# EAGLE board Line Follower Extensions (EAGLE 8.7.1)
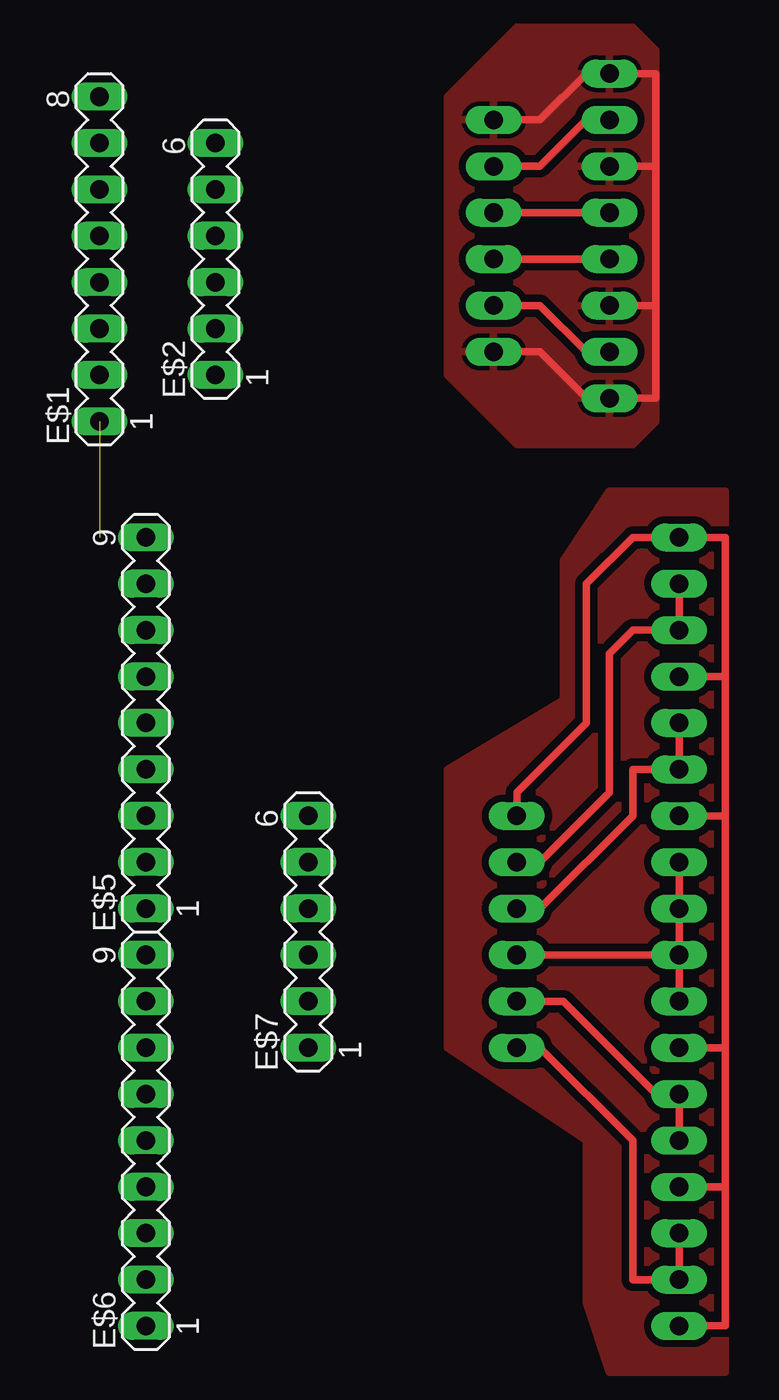
[diagram p0: board, top side]
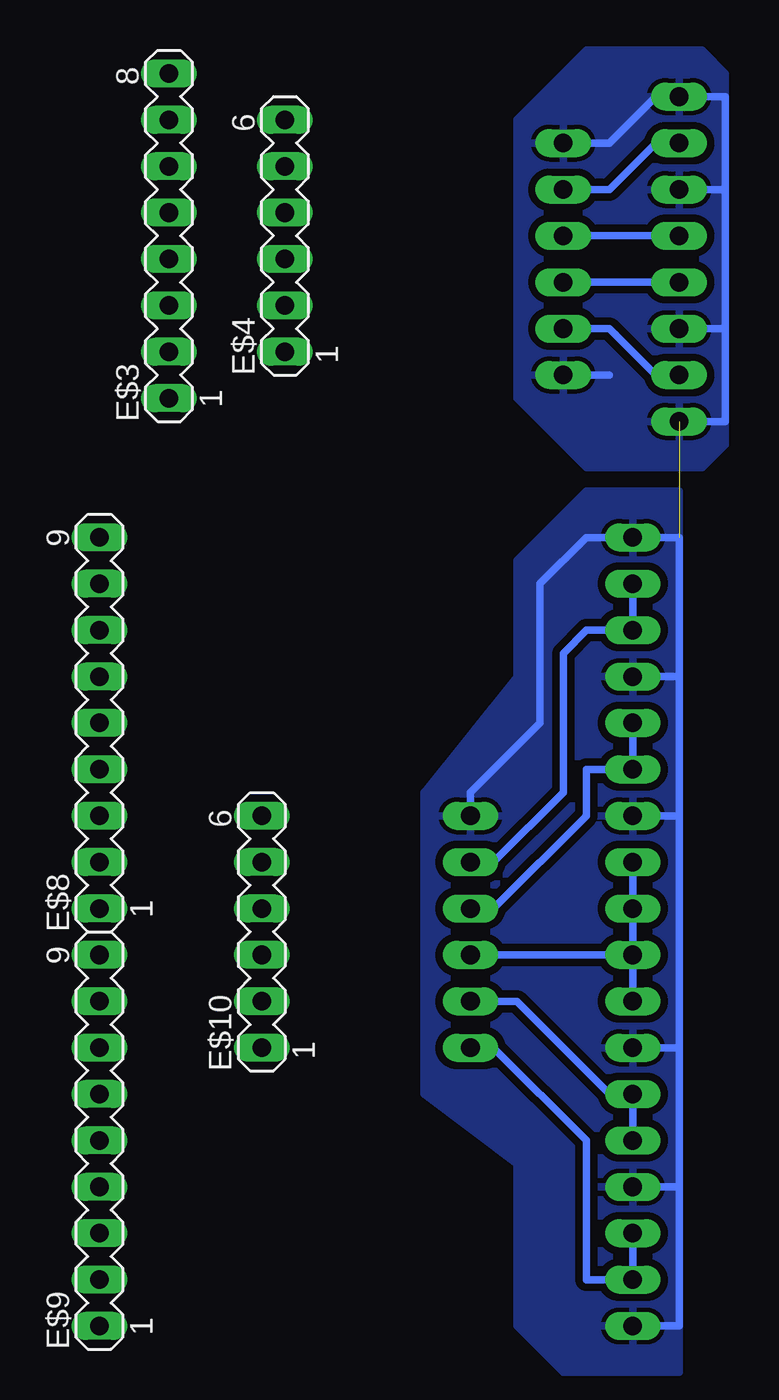
[diagram p1: board, bottom side, seen from below]

No outline drawn. Coordinates in mm, seen from the top.
Copper layers (1*16): Top 0.035mm / dielectric 1.5mm / Bottom 0.035mm
Design rules "default": minimum track width 10mil, minimum drill 24mil, track to track 8mil, track to pad 8mil, pad to pad 8mil, via to via 8mil, smd to smd 8mil, copper to edge 40mil, drill to drill 8mil, minimum pad ring 10mil, minimum via ring 8mil, stop-mask expansion 4mil, vias tented up to drill 0mil, thermal gap 10mil

## Footprints (pad centres in the part's own frame; a part is rotated, then mirrored left to right if it is on the bottom)
MA08-1 = drill 1.016 long: 1 -8.89,0; 2 -6.35,0; 3 -3.81,0; 4 -1.27,0; 5 1.27,0; 6 3.81,0; 7 6.35,0; 8 8.89,0
MA06-1 = drill 1.016 long: 1 -6.35,0; 2 -3.81,0; 3 -1.27,0; 4 1.27,0; 5 3.81,0; 6 6.35,0
MA09-1 = drill 1.016 long: 1 -10.16,0; 2 -7.62,0; 3 -5.08,0; 4 -2.54,0; 5 0,0; 6 2.54,0; 7 5.08,0; 8 7.62,0; 9 10.16,0

## Placement (x,y rotation side)
E$1  [MA08-1]  57.15,44.45 90 top
E$2  [MA06-1]  63.5,44.45 90 top
E$3  [MA08-1]  85.09,45.72 90 bottom
E$4  [MA06-1]  78.74,45.72 90 bottom
E$5  [MA09-1]  59.69,19.05 90 top
E$6  [MA09-1]  59.69,-3.81 90 top
E$7  [MA06-1]  68.58,7.62 90 top
E$8  [MA09-1]  88.9,19.05 90 bottom
E$9  [MA09-1]  88.9,-3.81 90 bottom
E$10  [MA06-1]  80.01,7.62 90 bottom

## Library data of the parts
E$1-E$10 = con-lstb

## Nets
GND: E$1.1 E$1.3 E$1.6 E$1.8 E$2.1 E$2.6 E$5.3 E$5.6 E$5.9 E$6.1 E$6.4 E$6.7 E$7.6
GND1: E$3.1 E$3.3 E$3.6 E$3.8 E$4.1 E$4.6
GND2: E$8.3 E$8.6 E$8.9 E$9.1 E$9.4 E$9.7 E$10.6
S$1: E$3.7 E$4.5
S$2: E$1.4 E$2.3
S$3: E$1.5 E$2.4
S$4: E$3.2 E$4.2
S$5: E$1.2 E$2.2
S$6: E$1.7 E$2.5
S$7: E$3.4 E$4.3
S$8: E$3.5 E$4.4
S$9: E$5.7 E$5.8 E$7.5
S$10: E$5.4 E$5.5 E$7.4
S$11: E$6.5 E$6.6 E$7.2
S$12: E$6.2 E$6.3 E$7.1
S$14: E$8.7 E$8.8 E$10.5
S$15: E$8.4 E$8.5 E$10.4
S$16: E$9.5 E$9.6 E$10.2
S$17: E$9.2 E$9.3 E$10.1
VCC: E$5.1 E$5.2 E$6.8 E$6.9 E$7.3
VCC1: E$8.1 E$8.2 E$9.8 E$9.9 E$10.3

## Tracks (layer width: path | path; a pad name or v marks a point on that pad's centre or on a via)
GND  (1 unrouted)
  Bottom 0.406: 54.61,48.26 54.61,53.34 E$1.8 58.42,53.34 60.96,50.8 E$2.6 | E$1.6 54.61,48.26 | 54.61,48.26 54.61,40.64 | 54.61,40.64 54.61,35.56 E$1.1 58.42,35.56 | 54.61,40.64 E$1.3 | 60.96,38.1 E$2.1 | E$6.1 57.15,-13.97 57.15,-6.35 | E$6.4 57.15,-6.35 | 57.15,-6.35 57.15,1.27 | E$6.7 57.15,1.27 | 57.15,1.27 57.15,13.97 | 57.15,13.97 57.15,21.59 | 57.15,21.59 57.15,29.21 E$5.9 62.23,29.21 64.77,26.67 64.77,19.05 68.58,15.24 E$7.6 | E$5.6 57.15,21.59 | 57.15,13.97 E$5.3
  pour Bottom (isolate 0.406): 54.61,54.61 54.61,34.29 55.88,33.02 59.69,33.02 62.23,33.02 66.04,36.83 66.04,52.07 62.23,55.88 55.88,55.88
  pour Bottom (isolate 0.406): 57.15,31.75 57.15,-16.51 63.5,-16.51 66.04,-13.97 66.04,-5.08 71.12,-1.27 71.12,15.24 66.04,21.59 66.04,27.94 62.23,31.75
  pour Top (isolate 0.406): 91.44,31.75 91.44,-16.51 85.09,-16.51 83.82,-12.7 83.82,-3.81 76.2,1.27 76.2,16.51 82.55,20.32 82.55,27.94 85.09,31.75
GND1
  Top 0.406: 87.63,49.53 87.63,54.61 E$3.8 83.82,54.61 81.28,52.07 E$4.6 | E$3.6 87.63,49.53 | 87.63,49.53 87.63,41.91 | 87.63,41.91 87.63,36.83 E$3.1 83.82,36.83 81.28,39.37 E$4.1 | 87.63,41.91 E$3.3
  pour Top (isolate 0.406): 87.63,55.88 87.63,35.56 86.36,34.29 80.01,34.29 76.2,38.1 76.2,53.34 80.01,57.15 86.36,57.15
GND2
  Top 0.406: E$9.1 91.44,-13.97 91.44,-6.35 | E$9.4 91.44,-6.35 | 91.44,-6.35 91.44,1.27 | E$9.7 91.44,1.27 | 91.44,1.27 91.44,13.97 | 91.44,13.97 91.44,21.59 | 91.44,21.59 91.44,29.21 E$8.9 86.36,29.21 83.82,26.67 83.82,19.05 80.01,15.24 E$10.6 | E$8.6 91.44,21.59 | 91.44,13.97 E$8.3
S$1
  Top 0.406: E$3.7 83.82,52.07 81.28,49.53 E$4.5
S$2
  Bottom 0.406: E$1.4 E$2.3
S$3
  Bottom 0.406: E$1.5 E$2.4
S$4
  Top 0.406: E$3.2 83.82,39.37 81.28,41.91 E$4.2
S$5
  Bottom 0.406: E$1.2 58.42,38.1 60.96,40.64 E$2.2
S$6
  Bottom 0.406: E$1.7 58.42,50.8 60.96,48.26 E$2.5
S$7
  Top 0.406: E$3.4 E$4.3
S$8
  Top 0.406: E$3.5 E$4.4
S$9
  Bottom 0.406: E$5.8 E$5.7 62.23,24.13 63.5,22.86 63.5,15.24 67.31,11.43 E$7.5
S$10
  Bottom 0.406: E$5.5 E$5.4 62.23,16.51 62.23,13.97 67.31,8.89 E$7.4
S$11
  Bottom 0.406: E$6.5 E$6.6 60.96,-1.27 66.04,3.81 E$7.2
S$12
  Bottom 0.406: E$6.3 E$6.2 62.23,-11.43 62.23,-3.81 67.31,1.27 E$7.1
S$14
  Top 0.406: E$8.8 E$8.7 86.36,24.13 85.09,22.86 85.09,15.24 81.28,11.43 E$10.5
S$15
  Top 0.406: E$8.5 E$8.4 86.36,16.51 86.36,13.97 81.28,8.89 E$10.4
S$16
  Top 0.406: E$9.5 E$9.6 87.63,-1.27 82.55,3.81 E$10.2
S$17
  Top 0.406: E$9.3 E$9.2 86.36,-11.43 86.36,-3.81 81.28,1.27 E$10.1
VCC
  Bottom 0.406: E$5.2 E$5.1 E$6.9 | E$6.9 E$6.8 | E$6.9 E$7.3
VCC1
  Top 0.406: E$8.2 E$8.1 E$9.9 | E$9.9 E$9.8 | E$9.9 E$10.3